# Altium PCB PCB2.PcbDoc (part 2 of 4)
Units mm, origin at the board's own origin, x right, y up, seen from the top; angles counter-clockwise.
Board outline 100 x 100 mm, 4 copper layers (TOP-SIG, GND1, GND2, BOT-SIG), stack 1.586 mm thick; 331 components, 152 nets, 869 pads, 934 vias.
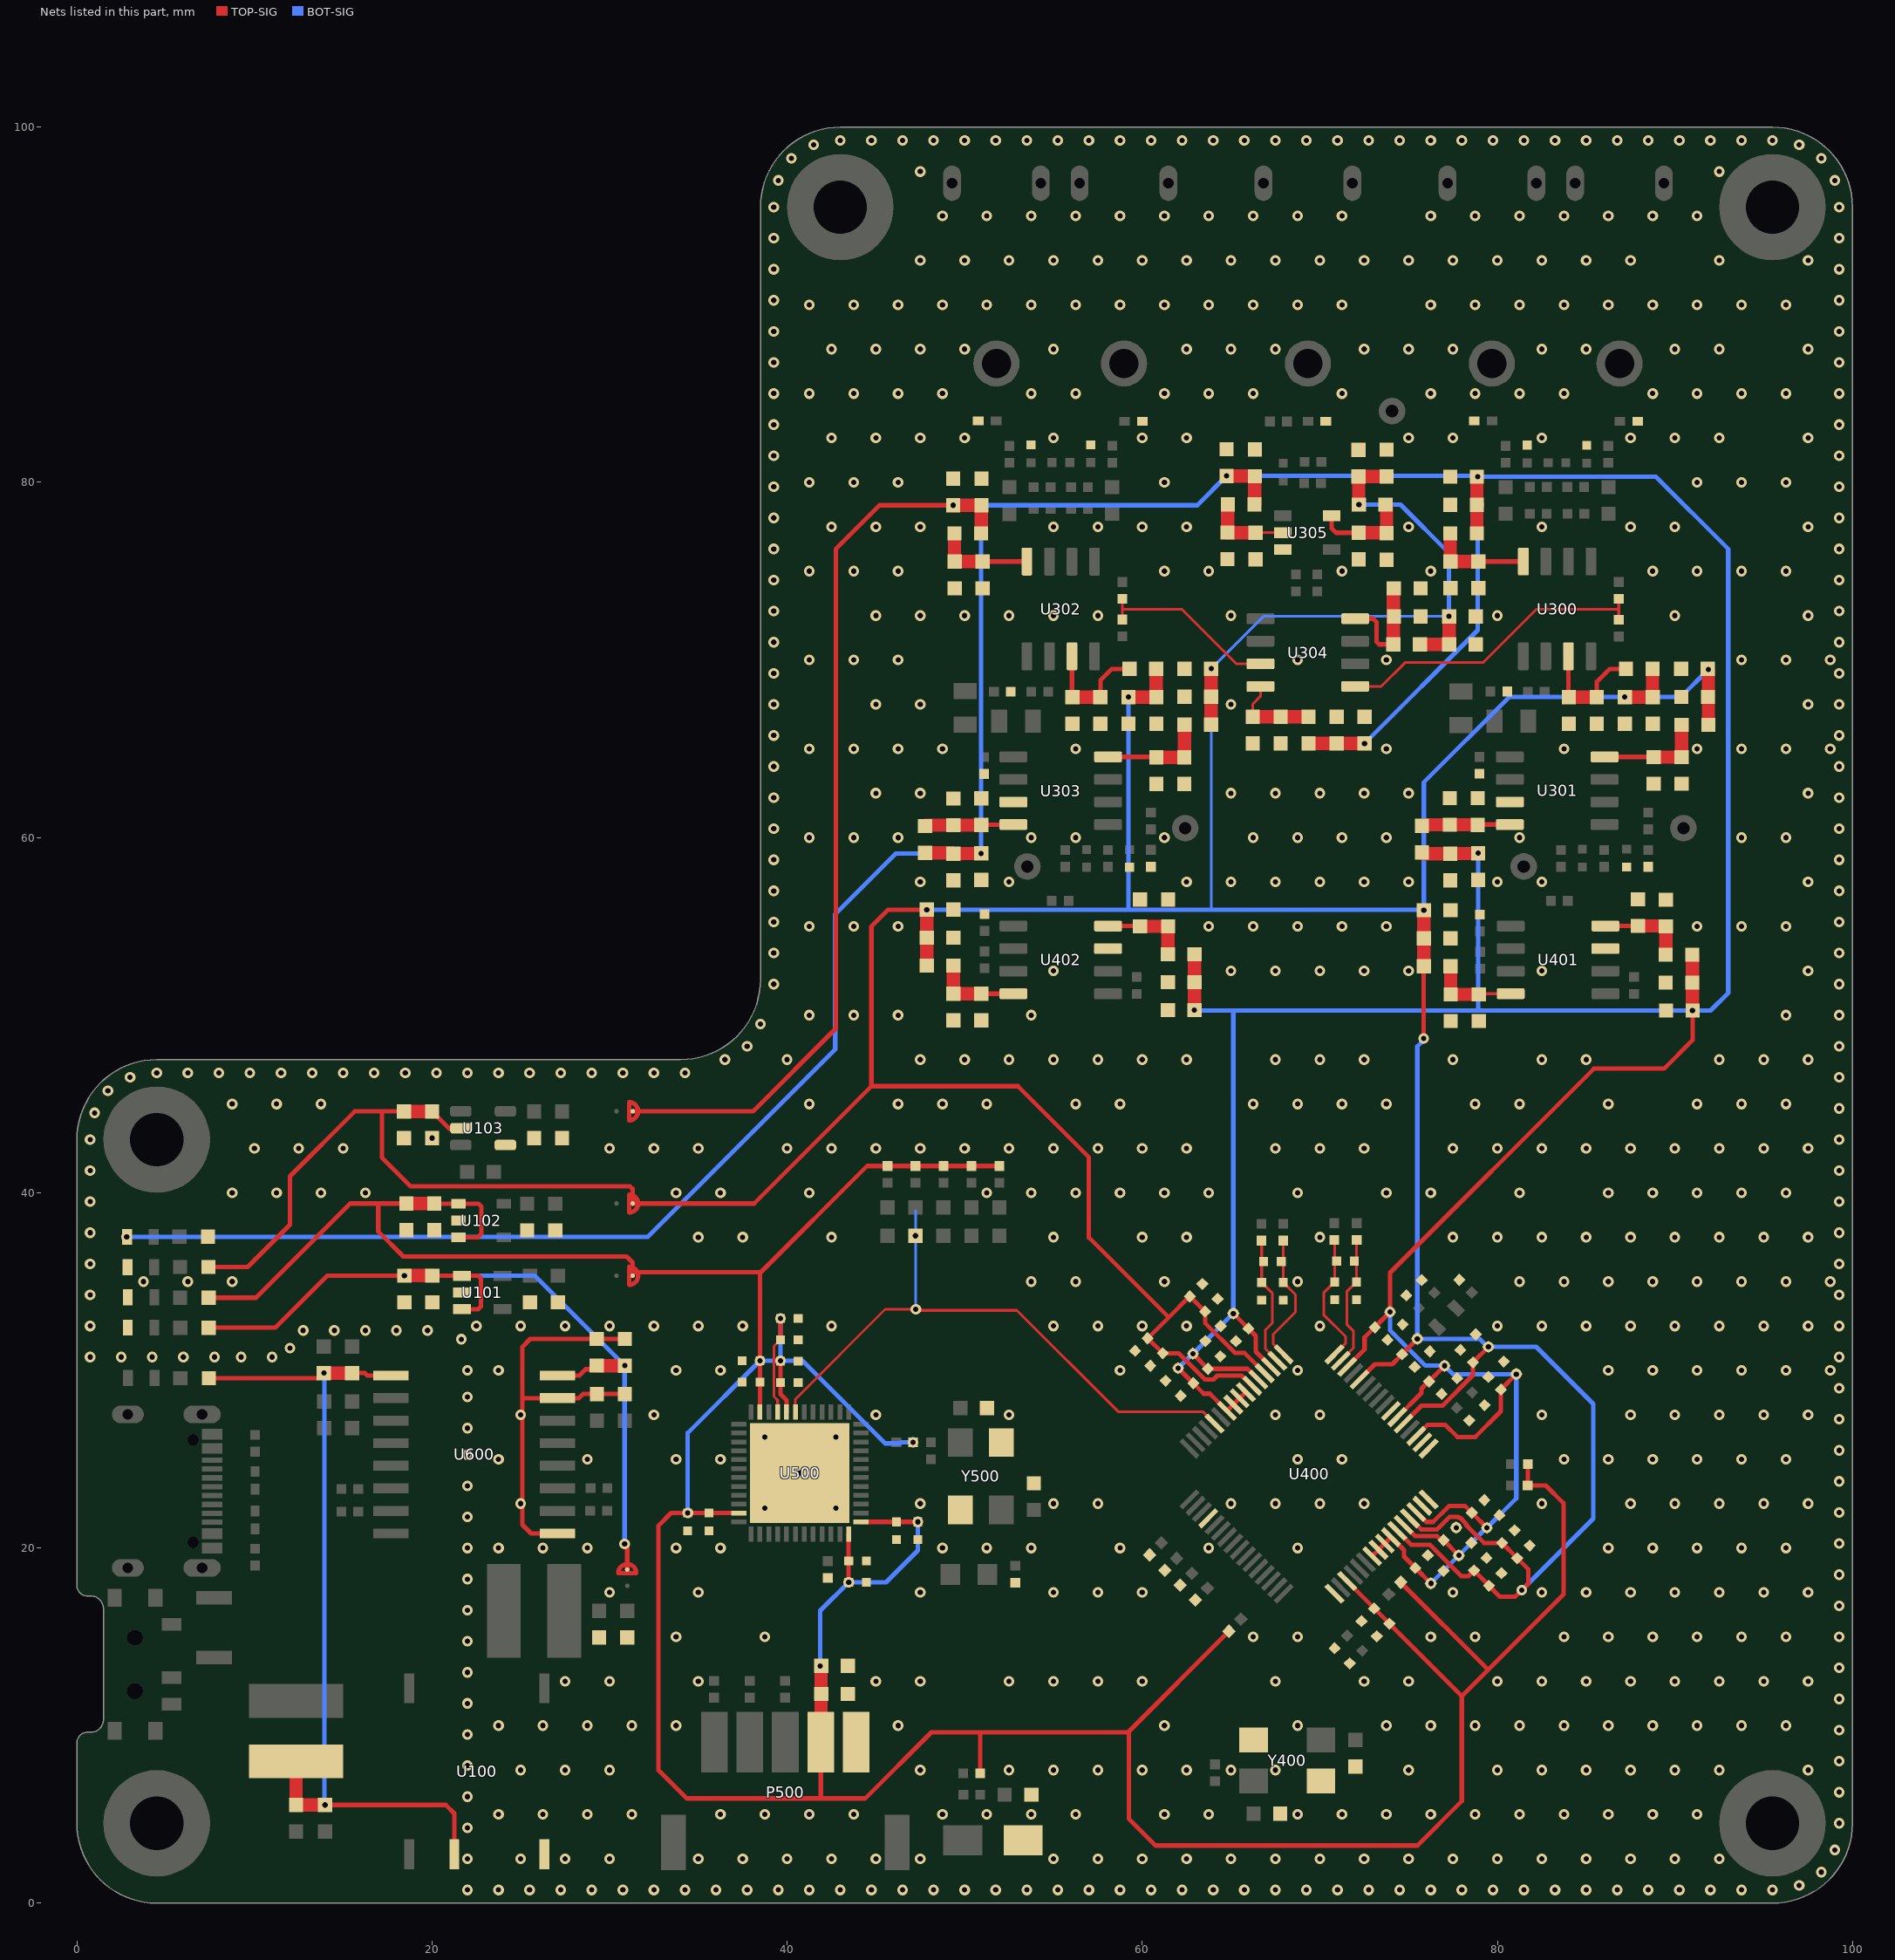
[diagram p4: the nets of this part, all layers, seen from the top]

## Part data
C100 C103 C300 C306 C309 C315: library part 0106034751035, "CAP, size 0603, 4.7 uF, 35 VDC", Capacitance="4.7 uF", Manufacture Name="Samsung Electro-Mechanics", Manufacture SN=CL10A475KL8NRNC, Operating Temperature="-55 to +125degC", Tolerance=+/-10%, Voltage Rating DC="35 VDC", ComponentLink2Description=Datasheet, ComponentLink2URL=https://www.mouser.vn/datasheet/2/585/MLCC-1837944.pdf, ComponentLink3Description=Buy, ComponentLink3URL=http://www.tme.vn/Product.aspx?id=1163#page=pro_info, Mounting Technology=SMT, Packaging="Tape and Reel", Size=0603, Supplier 1 Name=Mouser, Supplier 1 SN=187-CL10A475KL8NRNC, Supplier 1 URL=https://www.mouser.vn/ProductDetail/Samsung-Electro-Mechanics/CL10A475KL8NRNC?qs=xZ%2FP%252Ba9zWqa0jfvJtp%252BUEg%3D%3D&utm_source=mouser-refine-download&utm_medium=file&utm_campaign=CL10A475KL8NRNC&utm_content=Samsung-Electro-Mechanics, Supplier 2 Name=Digi-Key, Supplier 2 SN=1276-6794-2-ND, Supplier 2 URL=https://www.digikey.com/en/products/detail/samsung-electro-mechanics/cl10a475kl8nrnc/5961278, Supplier 3 Name=thegioiic, Supplier 3 SN=N/A, Supplier 3 URL=N/A
C101 C102 C105 C107 C109 C110 C114 C115 C319 C321 C323 C325 C327 C329 C331 C333 C335 C337 C339 C341 C343 C345 C347 C349 C351 C353 C355 C357 C359 C361 C363 C365 C449 C451 C453 C455 C461 C463 C465 C467 C502 C516 C602 C604 C605 C608: library part 0106031041050, "CAP, size 0603, 100 nF, 50 VDC", Capacitance="100 nF", Manufacture Name=TDK, Manufacture SN=CGA3E3X8R1H104K080AE, Operating Temperature="-55 to +125degC", Tolerance=+/-10%, Voltage Rating DC="50 VDC", ComponentLink2Description=Datasheet, ComponentLink2URL=https://product.tdk.com/system/files/dam/doc/product/capacitor/ceramic/mlcc/catalog/mlcc_automotive_soft_en.pdf?ref_disty=mouser, Mounting Technology=SMT, Packaging="Tape and Reel", Size=0603, Supplier 1 Name=Mouser, Supplier 1 SN=810-CGA3E3X8R1H104KA, Supplier 1 URL=https://www.mouser.com/ProductDetail/TDK/CGA3E3X8R1H104K080AE?qs=nQSIdc08i%252Bd8g3IRRgU2bw%3D%3D&utm_source=mouser-refine-download&utm_medium=file&utm_campaign=CGA3E3X8R1H104K080AE&utm_content=TDK, Supplier 2 Name=Digi-Key, Supplier 2 SN=445-173697-2-ND, Supplier 2 URL=https://www.digikey.com/en/products/detail/tdk-corporation/cga3e3x8r1h104k080ae/5809262, Supplier 3 Name=thegioiic, Supplier 3 SN=N/A, Supplier 3 URL=N/A
  C101 C102 C105: ComponentLink3Description=Buy, ComponentLink3URL=http://www.tme.vn/Product.aspx?id=739#page=pro_info
  C319 C321 C323 C325 C327 C329 C331 C333 C335 C337 C339 C341 C343 C345 C347 C349 C351 C353 C355 C357 C359 C361 C363 C365 C449 C451 C453 C455 C461 C463 C465 C467 C502 C516 C602 C604 C605 C608: Buy=https://tme.vn/Product.aspx?id=739#page=pro_info
C104 C106 C108 C111 C112 C113 C116: library part 0106032251010, "CAP, size 0603, 2.2 uF, 10 VDC", Capacitance="2.2 uF", Manufacture Name="Samsung Electro-Mechanics", Manufacture SN=CL10A225KP8NNWC, Operating Temperature="-55 to +125degC", Tolerance=+/-10%, Voltage Rating DC="10 VDC", ComponentLink2Description=Datasheet, ComponentLink2URL=https://www.mouser.vn/datasheet/2/585/Samsung_MLCC_1837944-1929650.pdf, Mounting Technology=SMT, Packaging="Tape and Reel", Size=0603, Supplier 1 Name=Mouser, Supplier 1 SN=187-CL10A225KP8NNWC, Supplier 1 URL=https://www.mouser.vn/ProductDetail/Samsung-Electro-Mechanics/CL10A225KP8NNWC?qs=f6khj2Jg0Fj5oIVDjMV6rg%3D%3D&utm_source=mouser-refine-download&utm_medium=file&utm_campaign=CL10A225KP8NNWC&utm_content=Samsung-Electro-Mechanics, Supplier 2 Name=Digi-Key, Supplier 2 SN=1276-CL10A225KP8NNWCTR-ND, Supplier 2 URL=https://www.digikey.com/en/products/detail/samsung-electro-mechanics/cl10a225kp8nnwc/16572766, Supplier 3 Name=thegioiic, Supplier 3 SN=N/A, Supplier 3 URL=N/A
C301 C305 C310 C314 C514: library part 885012205067, "WCAP-CSGP Multilayer Ceramic Chip Capacitor, General Purpose, size 0402, X7R, 10nF, 50V", Capacitance Tolerance=+/-10%, Case/Size Code=0402, Insulation Resistance=10GΩ, Manufacturer="Wurth Elektronik", Max Operating Temperature=125°C, Min Operating Temperature=-55°C, Rated Voltage (DC)=50V, Capacitance=10nF, Category="Multilayer Ceramic Chip Capacitors", Ceramic Type=X7R, ComponentLink1Description="Website Link", ComponentLink1URL=https://www.we-online.com/redexpert/article/885012205067?ad, ComponentLink2Description="Datasheet Link", ComponentLink2URL=https://www.we-online.com/redexpert/spec/885012205067?ad, Dissipation Factor=2.5%, Height=0.5mm, Length=1mm, Manufacturer Part Number=885012205067, Match Code=WCAP-CSGP, Mount="Surface Mount", Packaging="Tape and Reel", Technical Reference=X7R0402103K050DFCT10000, Width=0.5mm
  C514: Buy=https://www.digikey.com/en/products/detail/kemet/C0402C103K5RACTU/501968
C302 C304 C311 C313: library part 885012005057, "WCAP-CSGP Multilayer Ceramic Chip Capacitor, General Purpose, size 0402, NP0, 22pF, 50V", Capacitance Tolerance=+/-5%, Case/Size Code=0402, Insulation Resistance=10GΩ, Manufacturer="Wurth Elektronik", Max Operating Temperature=125°C, Min Operating Temperature=-55°C, Rated Voltage (DC)=50V, Capacitance=22pF, Category="Multilayer Ceramic Chip Capacitors", Ceramic Type=NP0, ComponentLink1Description="Website Link", ComponentLink1URL=https://www.we-online.com/redexpert/article/885012005057?ad, ComponentLink2Description="Datasheet Link", ComponentLink2URL=https://www.we-online.com/redexpert/spec/885012005057?ad, Height=0.5mm, Length=1mm, Manufacturer Part Number=885012005057, Match Code=WCAP-CSGP, Mount="Surface Mount", Packaging="Tape and Reel", Q Factor=840, Technical Reference=NP00402220J050DFCT10000, Width=0.5mm
C303 C312: library part 885012005063, "WCAP-CSGP Multilayer Ceramic Chip Capacitor, General Purpose, size 0402, NP0, 220pF, 50V", Capacitance Tolerance=+/-5%, Case/Size Code=0402, Insulation Resistance=10GΩ, Manufacturer="Wurth Elektronik", Max Operating Temperature=125°C, Min Operating Temperature=-55°C, Rated Voltage (DC)=50V, Capacitance=220pF, Category="Multilayer Ceramic Chip Capacitors", Ceramic Type=NP0, ComponentLink1Description="Website Link", ComponentLink1URL=https://www.we-online.com/redexpert/article/885012005063?ad, ComponentLink2Description="Datasheet Link", ComponentLink2URL=https://www.we-online.com/redexpert/spec/885012005063?ad, Height=0.5mm, Length=1mm, Manufacturer Part Number=885012005063, Match Code=WCAP-CSGP, Mount="Surface Mount", Packaging="Tape and Reel", Q Factor=1000, Technical Reference=NP00402221J050DFCT10000, Width=0.5mm
C307 C308 C316 C317: library part 0108051061025, "33 µF ±20% 6.3V Ceramic Capacitor X5R 0805 (2012 Metric)", Capacitance="10 uF", Manufacture Name=TDK, Manufacture SN=CGA4J1X7S1E106K125AE, Operating Temperature="-55 to +125degC", Tolerance=+/-10%, Voltage Rating DC="25 VDC", ComponentLink3Description=Buy, ComponentLink3URL=https://www.digikey.com/en/products/detail/tdk-corporation/C2012X5R0J336M125AC/2443464, Mounting Technology=SMT, Packaging="Tape and Reel", Size=0805, Supplier 1 Name=Mouser, Supplier 1 SN=810-CGA4J1X7S1E106K2, Supplier 1 URL=https://www.mouser.vn/ProductDetail/TDK/CGA4J1X7S1E106K125AE?qs=PqoDHHvF64%252BJvhmUzM2odA%3D%3D&utm_source=mouser-refine-download&utm_medium=file&utm_campaign=CGA4J1X7S1E106K125AE&utm_content=TDK, Supplier 2 Name=Digi-Key, Supplier 2 SN=445-181411-2-ND, Supplier 2 URL=https://www.digikey.com/en/products/detail/tdk-corporation/cga4j1x7s1e106k125ae/9744777, Supplier 3 Name=thegioiic, Supplier 3 SN=OEM, Supplier 3 URL=N/A
C318: library part 885012205044, "WCAP-CSGP Multilayer Ceramic Chip Capacitor, General Purpose, size 0402, X7R, 1nF, 25V", Capacitance Tolerance=+/-10%, Case/Size Code=0402, Insulation Resistance=10GΩ, Manufacturer="Wurth Elektronik", Max Operating Temperature=125°C, Min Operating Temperature=-55°C, Rated Voltage (DC)=25V, Capacitance=1nF, Category="Multilayer Ceramic Chip Capacitors", Ceramic Type=X7R, ComponentLink1Description="Website Link", ComponentLink1URL=https://www.we-online.com/redexpert/article/885012205044?ad, ComponentLink2Description="Datasheet Link", ComponentLink2URL=https://www.we-online.com/redexpert/spec/885012205044?ad, Dissipation Factor=3.5%, Height=0.5mm, Length=1mm, Manufacturer Part Number=885012205044, Match Code=WCAP-CSGP, Mount="Surface Mount", Packaging="Tape and Reel", Technical Reference=X7R0402102K025DFCT10000, Width=0.5mm
C320 C322 C324 C326 C328 C330 C332 C334 C336 C338 C340 C342 C344 C346 C348 C350 C352 C354 C356 C358 C360 C362 C364 C366 C450 C452 C454 C456 C462 C464 C466 C468: library part 0106031061010, "CAP, size 0603, 10 uF, 10 VDC", Capacitance="10 uF", Manufacture Name="Samsung Electro-Mechanics", Manufacture SN=CL10A106KP8NNWC, Operating Temperature="-55 to +125degC", Tolerance=+/-10%, Voltage Rating DC="10 VDC", Buy=https://tme.vn/Product.aspx?id=1165#page=pro_info, ComponentLink2Description=Datasheet, ComponentLink2URL=https://www.mouser.vn/datasheet/2/585/MLCC-1837944.pdf, Mounting Technology=SMT, Packaging="Tape and Reel", Size=0603, Supplier 1 Name=Mouser, Supplier 1 SN=187-CL10A106KP8NNWC, Supplier 1 URL=https://www.mouser.vn/ProductDetail/Samsung-Electro-Mechanics/CL10A106KP8NNWC?qs=xZ%2FP%252Ba9zWqZx8LSX23YqWA%3D%3D&utm_source=mouser-refine-download&utm_medium=file&utm_campaign=CL10A106KP8NNWC&utm_content=Samsung-Electro-Mechanics, Supplier 2 Name=Digi-Key, Supplier 2 SN=1276-CL10A106KP8NNWCTR-ND, Supplier 2 URL=https://www.digikey.com/en/products/detail/samsung-electro-mechanics/cl10a106kp8nnwc/16572907, Supplier 3 Name=thegioiic, Supplier 3 SN=N/A, Supplier 3 URL=https://www.thegioiic.com/tu-gom-0603-10uf-25v
C400 C402 C403 C407: library part 885012005063, "WCAP-CSGP Multilayer Ceramic Chip Capacitor, General Purpose, size 0402, NP0, 270pF, 50V", Capacitance Tolerance=+/-5%, Case/Size Code=0402, Insulation Resistance=10GΩ, Manufacturer="Wurth Elektronik", Max Operating Temperature=125°C, Min Operating Temperature=-55°C, Rated Voltage (DC)=50V, Buy=https://www.digikey.com/en/products/detail/kemet/C0402C271J5GACTU/2269192, Capacitance=220pF, Category="Multilayer Ceramic Chip Capacitors", Ceramic Type=NP0, ComponentLink1Description="Website Link", ComponentLink1URL=https://www.we-online.com/redexpert/article/885012005063?ad, ComponentLink2Description="Datasheet Link", ComponentLink2URL=https://www.we-online.com/redexpert/spec/885012005063?ad, Height=0.5mm, Length=1mm, Manufacturer Part Number=885012005063, Match Code=WCAP-CSGP, Mount="Surface Mount", Packaging="Tape and Reel", Q Factor=1000, Technical Reference=NP00402221J050DFCT10000, Width=0.5mm
C401 C404: library part 885012205060, "WCAP-CSGP Multilayer Ceramic Chip Capacitor, General Purpose, size 0402, X7R, 680pF, 50V", Capacitance Tolerance=+/-10%, Case/Size Code=0402, Insulation Resistance=10GΩ, Manufacturer="Wurth Elektronik", Max Operating Temperature=125°C, Min Operating Temperature=-55°C, Rated Voltage (DC)=50V, Buy=https://www.digikey.com/en/products/detail/murata-electronics/GRM1555C1H681JA01D/702505, Capacitance=680pF, Category="Multilayer Ceramic Chip Capacitors", Ceramic Type=X7R, ComponentLink1Description="Website Link", ComponentLink1URL=https://www.we-online.com/redexpert/article/885012205060?ad, ComponentLink2Description="Datasheet Link", ComponentLink2URL=https://www.we-online.com/redexpert/spec/885012205060?ad, Dissipation Factor=2.5%, Height=0.5mm, Length=1mm, Manufacturer Part Number=885012205060, Match Code=WCAP-CSGP, Mount="Surface Mount", Packaging="Tape and Reel", Technical Reference=X7R0402681K050DFCT10000, Width=0.5mm
C405 C408 C410 C415 C417 C419 C421 C423 C427 C431 C433 C441 C443 C447 C457 C459 C469 C471 C473 C511 C513: library part 885012105012, "1 µF ±10% 16V Ceramic Capacitor X7R 0603 (1608 Metric)", Capacitance Tolerance=+/-20%, Case/Size Code=0402, Insulation Resistance=0.05GΩ, Manufacturer="Wurth Elektronik", Max Operating Temperature=85°C, Min Operating Temperature=-55°C, Rated Voltage (DC)=10V, Buy=https://www.digikey.com/en/products/detail/kemet/C0603C105K4RACTU/2199788, Capacitance=1μF, Category="Multilayer Ceramic Chip Capacitors", Ceramic Type=X5R, ComponentLink1Description="Website Link", ComponentLink1URL=https://www.we-online.com/redexpert/article/885012105012?ad, ComponentLink2Description="Datasheet Link", ComponentLink2URL=https://www.we-online.com/redexpert/spec/885012105012?ad, Dissipation Factor=15%, Height=0.5mm, Length=1mm, Manufacturer Part Number=885012105012, Match Code=WCAP-CSGP, Mount="Surface Mount", Packaging="Tape and Reel", Technical Reference=X5R0402105M010DFCT10000, Width=0.5mm
C406 C409 C411 C412 C416 C418 C420 C422 C424 C428 C432 C434 C442 C444 C448 C458 C460 C470 C472 C474 C504 C506 C508 C510 C512: library part 885012205086, "WCAP-CSGP Multilayer Ceramic Chip Capacitor, General Purpose, size 0402, X7R, 100nF, 50V", Capacitance Tolerance=+/-10%, Case/Size Code=0402, Insulation Resistance=0.5GΩ, Manufacturer="Wurth Elektronik", Max Operating Temperature=125°C, Min Operating Temperature=-55°C, Rated Voltage (DC)=50V, Buy=tme.vn/Product.aspx?id=1812#page=pro_info, Capacitance=100nF, Category="Multilayer Ceramic Chip Capacitors", Ceramic Type=X7R, ComponentLink1Description="Website Link", ComponentLink1URL=https://www.we-online.com/redexpert/article/885012205086?ad, ComponentLink2Description="Datasheet Link", ComponentLink2URL=https://www.we-online.com/redexpert/spec/885012205086?ad, Dissipation Factor=10%, Height=0.5mm, Length=1mm, Manufacturer Part Number=885012205086, Match Code=WCAP-CSGP, Mount="Surface Mount", Packaging="Tape and Reel", Technical Reference=X7R0402104K050DFCT10000, Width=0.5mm
C413 C414 C500 C501: library part 0106032200550, "CAP, size 0603, 22 pF, 50 VDC", Manufacture Name=TDK, Manufacture SN=CGA3E2NP01H220J080AA, Operating Temperature="-55 to +125degC", Tolerance=+/-5%, Voltage Rating DC="50 VDC", Buy=https://tme.vn/Product.aspx?id=741#page=pro_info, Mounting Technology=SMT, Packaging="Tape and Reel", Size=0603, Supplier 1 Name=Mouser, Supplier 1 SN=810-CGA3E2NP01H220JA, Supplier 1 URL=https://www.mouser.com/ProductDetail/TDK/CGA3E2NP01H220J080AA?qs=xLDY6iXSiQbIDiPJq57tVA%3D%3D&utm_source=mouser-refine-download&utm_medium=file&utm_campaign=CGA3E2NP01H220J080AA&utm_content=TDK, Supplier 2 Name=Digi-Key, Supplier 2 SN=445-12401-2-ND, Supplier 2 URL=https://www.digikey.com/en/products/detail/tdk-corporation/cga3e2np01h220j080aa/3949637, Supplier 3 Name=thegioiic, Supplier 3 SN=N/A, Supplier 3 URL=N/A
C503 C505 C507 C509: library part 885012105008, "WCAP-CSGP Multilayer Ceramic Chip Capacitor, General Purpose, size 0402, X5R, 4.7μF, 6.3V", Capacitance Tolerance=+/-20%, Case/Size Code=0402, Insulation Resistance=0.01GΩ, Manufacturer="Wurth Elektronik", Max Operating Temperature=85°C, Min Operating Temperature=-55°C, Rated Voltage (DC)=6.3V, Buy=https://www.digikey.com/en/products/detail/samsung-electro-mechanics/CL05A475MP5NRNC/3887140, Capacitance=4.7μF, Category="Multilayer Ceramic Chip Capacitors", Ceramic Type=X5R, ComponentLink1Description="Website Link", ComponentLink1URL=https://www.we-online.com/redexpert/article/885012105008?ad, ComponentLink2Description="Datasheet Link", ComponentLink2URL=https://www.we-online.com/redexpert/spec/885012105008?ad, Dissipation Factor=20%, Height=0.5mm, Length=1mm, Manufacturer Part Number=885012105008, Match Code=WCAP-CSGP, Mount="Surface Mount", Packaging="Tape and Reel", Technical Reference=X5R0402475M6R3DFCT10000, Width=0.5mm
C515 C601 C603 C606 C607: library part 0106031051016, "CAP, size 0603, 1 uF, 16 VDC", Capacitance="1 uF", Manufacture Name="Samsung Electro-Mechanics", Manufacture SN=CL10B105KO8NNWC, Operating Temperature="-55 to +125degC", Tolerance=+/-10%, Voltage Rating DC="16 VDC", Buy=https://tme.vn/Product.aspx?id=728#page=pro_info, Mounting Technology=SMT, Packaging="Tape and Reel", Size=0603, Supplier 1 Name=Mouser, Supplier 1 SN=187-CL10B105KO8NNWC, Supplier 1 URL=https://www.mouser.vn/ProductDetail/Samsung-Electro-Mechanics/CL10B105KO8NNWC?qs=81r%252BiQLm7BT%252BXtc72qn1ug%3D%3D&utm_source=mouser-refine-download&utm_medium=file&utm_campaign=CL10B105KO8NNWC&utm_content=Samsung-Electro-Mechanics, Supplier 2 Name=Digi-Key, Supplier 2 SN=1276-CL10B105KO8NNWCTR-ND, Supplier 2 URL=https://www.digikey.com/en/products/detail/samsung-electro-mechanics/cl10b105ko8nnwc/16572783, Supplier 3 Name=thegioiic, Supplier 3 SN=N/A, Supplier 3 URL=https://www.thegioiic.com/tu-gom-0603-1uf-16v
D100 D403: library part 160603BlueBlur, "WL-SMCW SMT Mono-color Chip LED Blur, size 0603, Blue, 3.2V, 140deg", Color=Blue, ComponentLink1Description="Datasheet link", ComponentLink1URL=N/A, ComponentLink2Description="Supplier 1 URL", ComponentLink2URL=https://www.mouser.vn/ProductDetail/ams-OSRAM/LB-Q39E-L2OO-35-1?qs=74fRo9GAWsz%2FeNvglIOl1w%3D%3D, ComponentLink3Description="Supplier 2 URL", ComponentLink3URL=https://www.digikey.com/en/products/detail/ams-osram-usa-inc/LB-Q39E-N1OO-35-1/2176321, ComponentLink4Description="Supplier 3 URL", ComponentLink4URL=N/A, Size=0603, Supplier 1 Name=Mouser, Supplier 1 SN=720-LBQ39EL2N2351, Supplier 1 URL=https://www.mouser.vn/ProductDetail/ams-OSRAM/LB-Q39E-L2OO-35-1?qs=74fRo9GAWsz%2FeNvglIOl1w%3D%3D, Supplier 2 Name=Digi-Key, Supplier 2 SN=475-LBQ39E-N1OO-35-1TR-ND, Supplier 2 URL=https://www.digikey.com/en/products/detail/ams-osram-usa-inc/LB-Q39E-N1OO-35-1/2176321, Supplier 3 Name=ICDayRoi, Supplier 3 SN=N/A, Supplier 3 URL=N/A, Type=Blur
  D100: ComponentLink5Description=Buy, ComponentLink5URL=https://www.thegioiic.com/led-xanh-duong-0603-dan-smd-trong-suot-harvatek
D101 D401: library part 160603RedClear, "WL-SMCW SMT Mono-color Chip LED Waterclear, size 0603, Red, 2V, 140deg", Color=Red, ComponentLink1Description="Datasheet link", ComponentLink1URL=N/A, ComponentLink2Description="Supplier 1 URL", ComponentLink2URL=https://www.mouser.vn/ProductDetail/Wurth-Elektronik/150060RS75000?qs=LlUlMxKIyB3QnmZ3fw%2FVCA%3D%3D, ComponentLink3Description="Supplier 2 URL", ComponentLink3URL=https://www.digikey.com/en/products/detail/liteon/LTST-C191KRKT/386837, ComponentLink4Description="Supplier 3 URL", ComponentLink4URL=https://www.thegioiic.com/led-do-0603-dan-smd-trong-suot, Size=0603, Supplier 1 Name=Mouser, Supplier 1 SN=710-150060RS75000, Supplier 1 URL=https://www.mouser.vn/ProductDetail/Wurth-Elektronik/150060RS75000?qs=LlUlMxKIyB3QnmZ3fw%2FVCA%3D%3D, Supplier 2 Name=Digi-Key, Supplier 2 SN=160-1447-2-ND, Supplier 2 URL=https://www.digikey.com/en/products/detail/liteon/LTST-C191KRKT/386837, Supplier 3 Name=ICDayRoi, Supplier 3 SN=N/A, Supplier 3 URL=https://www.thegioiic.com/led-do-0603-dan-smd-trong-suot, Type=Clear
D102: library part 160603YellowBlur, "WL-SMCW SMT Mono-color Chip LED Blur, size 0603, Yellow, 2V, 140deg", Color=Yellow, ComponentLink1Description="Datasheet link", ComponentLink1URL=N/A, ComponentLink2Description="Supplier 1 URL", ComponentLink2URL=https://www.mouser.vn/ProductDetail/ROHM-Semiconductor/CSL1901YW1?qs=vvQtp7zwQdO0NUeC1uqWRA%3D%3D, ComponentLink3Description="Supplier 2 URL", ComponentLink3URL=https://www.digikey.com/en/products/detail/rohm-semiconductor/SML-D12Y8WT86/1641801, ComponentLink4Description="Supplier 3 URL", ComponentLink4URL=N/A, ComponentLink5Description=Buy, ComponentLink5URL=https://www.thegioiic.com/led-vang-0603-dan-smd-trong-suot, Size=0603, Supplier 1 Name=Mouser, Supplier 1 SN=755-CSL1901YW1, Supplier 1 URL=https://www.mouser.vn/ProductDetail/ROHM-Semiconductor/CSL1901YW1?qs=vvQtp7zwQdO0NUeC1uqWRA%3D%3D, Supplier 2 Name=Digi-Key, Supplier 2 SN=511-1582-2-ND, Supplier 2 URL=https://www.digikey.com/en/products/detail/rohm-semiconductor/SML-D12Y8WT86/1641801, Supplier 3 Name=ICDayRoi, Supplier 3 SN=N/A, Supplier 3 URL=N/A, Type=Blur
D103: library part 160603GreenBlur, "WL-SMCW SMT Mono-color Chip LED Blur, size 0603, Green, 3.2V, 140deg", Color=Green, ComponentLink1Description="Datasheet link", ComponentLink1URL=N/A, ComponentLink2Description="Supplier 1 URL", ComponentLink2URL=https://www.mouser.vn/ProductDetail/ROHM-Semiconductor/SMLD12EN1WT86?qs=qSfuJ%252Bfl%2Fd4fR%252B9yZydIwg%3D%3D, ComponentLink3Description="Supplier 2 URL", ComponentLink3URL=https://www.digikey.com/en/products/detail/rohm-semiconductor/SML-D12M8WT86/1641797, ComponentLink4Description="Supplier 3 URL", ComponentLink4URL=N/A, ComponentLink5Description=Buy, ComponentLink5URL=https://www.thegioiic.com/led-xanh-la-0603-dan-smd-trong-suot, Size=0603, Supplier 1 Name=Mouser, Supplier 1 SN=755-SMLD12EN1WT86, Supplier 1 URL=https://www.mouser.vn/ProductDetail/ROHM-Semiconductor/SMLD12EN1WT86?qs=qSfuJ%252Bfl%2Fd4fR%252B9yZydIwg%3D%3D, Supplier 2 Name=Digi-Key, Supplier 2 SN=511-1578-2-ND, Supplier 2 URL=https://www.digikey.com/en/products/detail/rohm-semiconductor/SML-D12M8WT86/1641797, Supplier 3 Name=ICDayRoi, Supplier 3 SN=N/A, Supplier 3 URL=N/A, Type=Blur
D104 D404: library part 160603PinkBlur, "WL-SMCW SMT Mono-color Chip LED Blur, size 0603, Pink", Color=Pink, ComponentLink1Description="Datasheet link", ComponentLink1URL=N/A, ComponentLink2Description="Supplier 1 URL", ComponentLink2URL=N/A, ComponentLink3Description="Supplier 2 URL", ComponentLink3URL=https://www.digikey.com/en/products/detail/rohm-semiconductor/SMLD12HBC7W1/3587026, ComponentLink4Description="Supplier 3 URL", ComponentLink4URL=N/A, Size=0603, Supplier 1 Name=Mouser, Supplier 1 SN=N/A, Supplier 1 URL=N/A, Supplier 2 Name=Digi-Key, Supplier 2 SN=846-1108-2-ND, Supplier 2 URL=https://www.digikey.com/en/products/detail/rohm-semiconductor/SMLD12HBC7W1/3587026, Supplier 3 Name=ICDayRoi, Supplier 3 SN=N/A, Supplier 3 URL=N/A, Type=Blur
  D104: ComponentLink5Description=Buy, ComponentLink5URL=https://www.thegioiic.com/led-hong-0603-dan-smd-trong-suot
D200 D201 D202 D203 D204 D600 D601: "8.5V (Typ) Clamp 6.3A (8/20µs) Ipp Tvs Diode Surface Mount 2-X1SON (1x.60)", Package="X1SON-2 Texas Instruments", Availability=Warning, MF="Texas Instruments", Mouser-Purchase-URL=https://snapeda.com/shop?store=Mouser&id=616615, MP=TPD1E1B04DPYR, Price=None, SnapEDA_Link=https://www.snapeda.com/parts/TPD1E1B04DPYR/Texas%20Instruments/view-part/616615/?ref=snap, Texas_Instruments-Purchase-URL=https://snapeda.com/shop?store=Texas+Instruments&id=616615
D400: library part 160603YellowClear, "WL-SMCW SMT Mono-color Chip LED Waterclear, size 0603, Yellow, 2V, 140deg", Color=Yellow, ComponentLink1Description="Datasheet link", ComponentLink1URL=N/A, ComponentLink2Description="Supplier 1 URL", ComponentLink2URL=https://www.mouser.com/ProductDetail/Wurth-Elektronik/150060YS75003?qs=Li%252BoUPsLEnvfob7qsAi9dA%3D%3D, ComponentLink3Description="Supplier 2 URL", ComponentLink3URL=https://www.digikey.com/en/products/detail/liteon/LTST-C191KSKT/386839, ComponentLink4Description="Supplier 3 URL", ComponentLink4URL=https://icdayroi.com/led-yellow-0603, Size=0603, Supplier 1 Name=Mouser, Supplier 1 SN=710-150060YS75003, Supplier 1 URL=https://www.mouser.com/ProductDetail/Wurth-Elektronik/150060YS75003?qs=Li%252BoUPsLEnvfob7qsAi9dA%3D%3D, Supplier 2 Name=Digi-Key, Supplier 2 SN=160-1448-2-ND, Supplier 2 URL=https://www.digikey.com/en/products/detail/liteon/LTST-C191KSKT/386839, Supplier 3 Name=ICDayRoi, Supplier 3 SN=N/A, Supplier 3 URL=https://icdayroi.com/led-yellow-0603, Type=Clear
D402: library part 160603GreenClear, "WL-SMCW SMT Mono-color Chip LED Waterclear, size 0603, Green, 3.2V, 140deg", Color=Green, ComponentLink1Description="Datasheet link", ComponentLink1URL=N/A, ComponentLink2Description="Supplier 1 URL", ComponentLink2URL=https://www.mouser.vn/ProductDetail/Wurth-Elektronik/150060GS75000?qs=LlUlMxKIyB0UYkq5lDO8nA%3D%3D, ComponentLink3Description="Supplier 2 URL", ComponentLink3URL=https://www.digikey.com/en/products/detail/liteon/LTST-C191KGKT/386835, ComponentLink4Description="Supplier 3 URL", ComponentLink4URL=https://www.thegioiic.com/led-xanh-la-0603-dan-smd-trong-suot, Size=0603, Supplier 1 Name=Mouser, Supplier 1 SN=710-150060GS75000, Supplier 1 URL=https://www.mouser.vn/ProductDetail/Wurth-Elektronik/150060GS75000?qs=LlUlMxKIyB0UYkq5lDO8nA%3D%3D, Supplier 2 Name=Digi-Key, Supplier 2 SN=160-1446-2-ND, Supplier 2 URL=https://www.digikey.com/en/products/detail/liteon/LTST-C191KGKT/386835, Supplier 3 Name=ICDayRoi, Supplier 3 SN=N/A, Supplier 3 URL=https://www.thegioiic.com/led-xanh-la-0603-dan-smd-trong-suot, Type=Clear
D500: library part 160805BlueClear, "WL-SMCW SMT Mono-color Chip LED Waterclear, size 0805, Blue, 3.2V, 140deg", Color=Blue, ComponentLink1Description="Datasheet link", ComponentLink1URL=N/A, ComponentLink2Description="Supplier 1 URL", ComponentLink2URL=https://www.mouser.vn/ProductDetail/Wurth-Elektronik/150080BS75000?qs=2kOmHSv6VfT2tBo3UPVqAQ%3D%3D, ComponentLink3Description="Supplier 2 URL", ComponentLink3URL=https://www.digikey.com/en/products/detail/liteon/LTST-C170TBKT/388527, ComponentLink4Description="Supplier 3 URL", ComponentLink4URL=https://www.thegioiic.com/led-xanh-duong-0805-dan-smd-trong-suot-harvatek, Size=0603, Supplier 1 Name=Mouser, Supplier 1 SN=710-150080BS75000, Supplier 1 URL=https://www.mouser.vn/ProductDetail/Wurth-Elektronik/150080BS75000?qs=2kOmHSv6VfT2tBo3UPVqAQ%3D%3D, Supplier 2 Name=Digi-Key, Supplier 2 SN=160-1579-2-ND, Supplier 2 URL=https://www.digikey.com/en/products/detail/liteon/LTST-C170TBKT/388527, Supplier 3 Name=ICDayRoi, Supplier 3 SN=N/A, Supplier 3 URL=https://www.thegioiic.com/led-xanh-duong-0805-dan-smd-trong-suot-harvatek, Type=Clear
F100: library part 061206035006, "Resettable Fuse, Size 1206, 6V, 0.35A", Hold Current=0.35A, LCSC Part #=N/A, Manufacturer=Bourns, Manufacturer Part Number=MF-NSMF035-2, Package / Case=1206, Supplier 1 Part Number=652-MF-NSMF035-2, Supplier 2 Part Number=MF-NSMF035-2TR-ND, Threshold Current=100A, Threshold Voltage=6V, Trip Current=0.75A, ComponentLink1Description=Datasheet, ComponentLink1URL=https://www.bourns.com/docs/Product-Datasheets/mfnsmf.pdf, Mount=SMD/SMT, Packaging="Tape and Reel", Supplier 1=Mouser, Supplier 1 URL=https://www.mouser.vn/ProductDetail/Bourns/MF-NSMF035-2?qs=3eVyCPG4fwnHDrvs%2FGppSw%3D%3D, Supplier 2=Digi-Key, Supplier 2 URL=https://www.mouser.vn/ProductDetail/Bourns/MF-NSMF035-2?qs=3eVyCPG4fwnHDrvs%2FGppSw%3D%3D, Supplier 3=thegioiic, Supplier 3 Part Number=MF-NSMF035-2, Supplier 3 URL=https://www.thegioiic.com/mf-nsmf035-2-cau-chi-tu-phuc-hoi-1206-6v-0-35a
FB300 FB301 FB302 FB303 FB304 FB305 FB306 FB307 FB308 FB309 FB310 FB311 FB400 FB401 FB403 FB404: library part 03060312120225, "Ferrite, 0603, 120 Ohms, 2 A", Manufacture Name="Wurth Elektronik", Manufacture SN=742792625, Maximum DC Current="2 A", Maximum DC Resistance="50 mOhms", Operating Temperature="-55 to +125degC", Test Frequency="100 MHz", Tolerance=+/-25%, Buy=https://linhkien.cxtvn.com/9545-blm18sg121tn1d-ferrite-bead-120-ohm-0603-1ln-10c.html, Impedance="120 Ohms", Mounting Technology=SMT, Packaging="Tape and Reel", Size=0603, Supplier 1 Name=Mouser, Supplier 1 SN=710-742792625, Supplier 1 URL=https://www.mouser.com/ProductDetail/Wurth-Elektronik/742792625?qs=sGAEpiMZZMt1hubY80%2Fs8OCciRuv%2FFk6PJE4za4cFPDWegNO%252Bf6fVw%3D%3D&utm_source=mouser-refine-download&utm_medium=file&utm_campaign=742792625&utm_content=Wurth-Elektronik, Supplier 2 Name=Digi-Key, Supplier 2 SN=N/A, Supplier 2 URL=N/A, Supplier 3 Name=thegioiic, Supplier 3 SN=N/A, Supplier 3 URL=N/A
J100: "USB-C (USB TYPE-C) USB 2.0 Receptacle Connector 24 (16+8 Dummy) Position Surface Mount, Right Angle; Through Hole", Package=None, Availability=Unavailable, ComponentLink1Description=Buy, ComponentLink1URL=https://www.thegioiic.com/cong-usb-cai-3-1-type-c-16-chan-thang-dan-smd, MF="{'manufacturer': u'GCT'}", MP=USB4105-GF-A, Price=None
J200 J201 J202 J203 J204: "3 PIN Socket Female Socket for PCB EEG EMG DIN42802 1.5 mm Connector", ComponentLink1Description=Buy, ComponentLink1URL=https://www.alibaba.com/product-detail/3-PIN-Socket-Female-Socket-for_62497934533.html?chatToken=TDFKeWNGRlpkWFZTWmtkNFRYRnZjVWxhVTBsU2RVcHNkRVpKVTJsMlRteERiM0ZyWlhrM2VHMXhZeTkwTVVSb2RIQnFRMGxKTmtONE9GSllWWFFyVGtka2JsY3ZLMjB6UVdnMmRsaGxWbVZpU2xFNU5HeHRNWHBhVjJNdmFXcHlSelp0VHpKc01sVnFjMGRSYUZSbkwwRm9SM0ZJYjNSd1UxVTFORmszTUhKcGRERnVaVnBHVjJsaVQwdFRTRGx6WnpCcFVURnhXbWRsZHl0UU56bE5NRkJsVjBnelNXRjZibkJGUFE9PSZ2ZXJzaW9uPTIuMC4w&encryptTargetLoginId=8pctgRBMALPo2t4oyiyajgkFqFUijPBH6wdkfYSa%2Bs4%3D
L100: library part IND_22uH_4D28, "22uH 20% 1A SMD Power Inductor 4.8x4.8x2.8 mm", ComponentLink1Description=Buy, ComponentLink1URL=http://tme.vn/Product.aspx?id=1639#page=pro_info, Supply Name=tme, Supply Part Number="22uH 20% 1A SMD Power Inductor 4.8x4.8x2.8 mm", Supply URL=http://www.tme.vn/Product.aspx?id=1639#page=pro_info
L101: library part IND_47uH_4D28, "47uH 20% 1A SMD Power Inductor 4.8x4.8x2.8 mm", Supply Part Number="22uH 20% 1A SMD Power Inductor 4.8x4.8x2.8 mm", ComponentLink1Description=Buy, ComponentLink1URL=http://www.tme.vn/Product.aspx?id=1640#page=pro_info, Supply Name=tme
P500: library part 620105131822, "WR-WTB SMT Male Horizontal Shrouded Header, pitch 2mm, 5p", Contact Resistance=20mOhm, LCSC Part #=N/A, Manufacturer="Wurth Elektronik", Operating Temperature Max="+ 85 C", Operating Temperature Min="- 25 C", Package / Case=5, Rated Current=2A, Supplier 1 Part Number=710-620105131822, Withstanding Voltage=800VAC, Working Voltage=100VAC, ComponentLink1Description=Datasheet, ComponentLink1URL=https://www.we-online.com/catalog/datasheet/620105131822.pdf, Gender=Male, Manufacturer Part Number=620105131822, Mount=SMD/SMT, Packaging="Tape and Reel", Part Number=620105131822, Pin Number=5, Pitch=2mm, Supplier 1=Mouser, Supplier 1 URL=https://www.mouser.vn/ProductDetail/Wurth-Elektronik/620105131822?qs=ZtY9WdtwX54F%2Fgkpjaf7GA%3D%3D, Supplier 2=Digi-Key, Supplier 2 Part Number=N/A, Supplier 2 URL=N/A, Supplier 3=thegioiic, Supplier 3 Part Number=N/A, Supplier 3 URL=https://www.thegioiic.com/dau-ph-2-0mm-5-chan-dan-smd-nam-ngang, Type=Horizontal
R100 R103 R104 R105 R106: "Code 102, 1/10W", ComponentLink1Description=Buy, ComponentLink1URL=https://www.thegioiic.com/dien-tro-1-kohm-0603-1
R101 R102: "RC0402FR-135K1L", ComponentLink1Description=Buy, ComponentLink1URL=https://www.digikey.com/en/products/detail/yageo/RC0402FR-135K1L/14286364
R200 R201 R202 R203 R204 R311 R324 R400 R405 R406 R411: "Code 104, 1/16W 1%", ComponentLink1Description=Buy, ComponentLink1URL=https://www.thegioiic.com/dien-tro-100-kohm-0402-1-
R300 R301 R305 R306 R313 R314 R318 R319 R328: "Code 105, 1/16W 1%", ComponentLink1Description=Buy, ComponentLink1URL=https://www.thegioiic.com/dien-tro-1-mohm-0402-1-
R302 R315: "4.22 kOhms ±1% 0.1W, 1/10W Chip Resistor 0402 (1005 Metric) Automotive AEC-Q200 Thick Film", ComponentLink1Description=Buy, ComponentLink1URL=https://www.digikey.com/en/products/detail/panasonic-electronic-components/ERJ-2RKF4221X/192338
R303 R316: "60.4 kOhms ±1% 0.063W, 1/16W Chip Resistor 0402 (1005 Metric) Moisture Resistant Thick Film", ComponentLink1Description=Buy, ComponentLink1URL=https://www.digikey.com/en/products/detail/yageo/RC0402FR-0760K4L/726643
R304 R309 R317 R322: "138 kOhms ±1% 0.1W, 1/10W Chip Resistor 0402 (1005 Metric) Automotive AEC-Q200, Moisture Resistant Thin Film", ComponentLink1Description=Buy
  R304 R317: ComponentLink1URL=https://www.digikey.com/en/products/detail/koa-speer-electronics-inc/RN73R1ETTP1383F25/10000727
  R309 R322: ComponentLink1URL=https://www.digikey.com/en/products/detail/yageo/RC0402FR-1354K9L/17024812
R307 R320: "0 Ohms Jumper Chip Resistor 0402 (1005 Metric) Moisture Resistant Thick Film", ComponentLink1Description=Buy, ComponentLink1URL=https://www.digikey.com/en/products/detail/yageo/RC0402JR-070RL/726406
R308 R310 R321 R323: "2.77 kOhms ±0.1% 0.1W, 1/10W Chip Resistor 0402 (1005 Metric) Automotive AEC-Q200, Moisture Resistant Thin Film", Buy=https://www.digikey.com/en/products/detail/koa-speer-electronics-inc/RN73R1ETTP2771B25/10003222
R312 R325 R326 R327 R329 R402 R408 R413 R414 R415 R416 R417 R418 R419 R420 R421 R500 R502: "Code 103, 1/16W 1%", ComponentLink1Description=Buy, ComponentLink1URL=https://www.thegioiic.com/dien-tro-10-kohm-0402-1-
R401 R403 R407 R409: "10 Ohms ±1% 0.063W, 1/16W Chip Resistor 0402 (1005 Metric) Moisture Resistant Thick Film", Buy=https://www.digikey.com/en/products/detail/yageo/RC0402FR-0710RL/726524
R404 R410: "Code 113, 1/16W 5%", Buy=https://www.thegioiic.com/dien-tro-11-kohm-0402-5-, ComponentLink1Description=Buy, ComponentLink1URL=https://www.thegioiic.com/dien-tro-10-kohm-0402-1-
R412: "RM06FTN49R9", Buy=http://tme.vn/Product.aspx?id=1857#page=pro_info
R422 R423 R426: "220R (Code 221), 1/16W 5% 0402", Buy=https://www.thegioiic.com/dien-tro-220-ohm-0402-5-
R424 R425 R503 R504: "Code 104, 1/16W", ComponentLink1Description=Buy, ComponentLink1URL=https://www.thegioiic.com/dien-tro-100-ohm-0402-1-
R427 R501 R505 R506 R507 R600 R601 R602 R603: "1/16W Thick Film Resistors 50V ±5% ±200ppm/℃ 24Ω 0402 Chip Resistor - Surface Mount ROHS", Buy=https://www.lcsc.com/product-detail/Chip-Resistor-Surface-Mount_FH-Guangdong-Fenghua-Advanced-Tech-RC-02W240JT_C258123.html?s_z=n_24%2520Ohm
SW100: "WS-SLSU Mini Slide Switch, Same Side Connection Side Push, SPDT, 5VDC, 300mA, 240g", LCSC Part #=N/A, Manufacturer="Wurth Elektronik", Operating Temperature Max=85°C, Operating Temperature Min=-40°C, Rated Current=300mA, Rated Voltage=5VDC, Supplier 1 Part Number=710-450404015514, Supplier 2 Part Number=732-13665-2-ND, Supplier 3 Part Number=MSK-12C02, Category="Slide Switches", Circuit=SPDT, ComponentLink1Description=Datasheet, ComponentLink1URL=https://www.we-online.com/redexpert/spec/450404015514?ad, Contact Material="Copper Alloy", Contact Plating=Silver, Height=1.1mm, Length=6.7mm, Manufacturer Part Number=450404015514, Match Code=WS-SLSU, Mount="Surface Mount", Operation Force=240g, Packaging="Tape and Reel", Supplier 1=Mouser, Supplier 1 URL=https://www.mouser.com/ProductDetail/Wurth-Elektronik/450404015514?qs=sPbYRqrBIVk21%2FxsES2IZA%3D%3D, Supplier 2=Digi-Key, Supplier 2 URL=https://www.digikey.com/en/products/detail/w%C3%BCrth-elektronik/450404015514/9950812, Supplier 3=thegioiic, Supplier 3 URL=https://www.thegioiic.com/msk-12c02-cong-tac-truot-7-chan-on-off-smd-chinh-ngang-1p2t-0-5a, Terminal Material="Copper Alloy", Terminal Plating=Silver, Width=2.7mm
SW500: library part Button_SMD_3x4mm_2P, Supply Part Number="Tụ Gốm 0603 20pF 50V", Supply Name=Thegioiic, Supply URL=https://www.thegioiic.com/tu-gom-0603-20pf-50v
TP300 TP301 TP302 TP303 TP304: "Test Point TEST-1BK", Supply Name=BanLinhKien, Supply Part Number="Test Point TEST-1BK", Supply URL=https://banlinhkien.com/test-point-test1bk-mau-den-5c-p18255999.html
U100: "Isolated Module DC DC Converter 1 Output 5V 400mA 4.5V - 5.5V Input", Mfr_Name=Murata, ComponentLink1Description=Buy, ComponentLink1URL=https://www.digikey.com/en/products/detail/murata-power-solutions-inc/NXE2S0505MC-R7/6009739, RefDes=RefDes, Type=Type
U101: "Linear Voltage Regulator IC Positive Fixed 1 Output 500mA SOT-23-5", Mfr_Name="Richtek Technology", ComponentLink1Description=Buy, ComponentLink1URL=https://www.digikey.com/en/products/detail/richtek-usa-inc/RT9013-33GB/2546347, RefDes=RefDes, Type=Type
U102: "Linear Voltage Regulator IC Positive Fixed 1 Output 200mA SOT-23-5", Mfr_Name="Texas Instruments", ComponentLink1Description=Buy, ComponentLink1URL=https://www.digikey.com/en/products/detail/texas-instruments/TPS7A0525PDBVR/9489224, RefDes=RefDes, Type=TYPE
U103: "60mA Charge Pump Voltage Inverter with Fixed 250kHz Operation", Package="SOT-23-5 Texas Instruments", Arrow_Electronics-Purchase-URL=https://snapeda.com/shop?store=Arrow+Electronics&id=1101412, Availability=Unavailable, ComponentLink1Description=Buy, ComponentLink1URL=https://www.digikey.com/en/products/detail/texas-instruments/TPS60403DBVR/1672064, DigiKey-Purchase-URL=https://snapeda.com/shop?store=DigiKey&id=1101412, MF="Texas Instruments", Mouser-Purchase-URL=https://snapeda.com/shop?store=Mouser&id=1101412, MP=TPS60403DBVR, Price=None, SnapEDA_Link=https://www.snapeda.com/parts/TPS60403DBVR/Texas%20Instruments/view-part/1101412/?ref=snap, Texas_Instruments-Purchase-URL=https://snapeda.com/shop?store=Texas+Instruments&id=1101412
U300 U302: "Precision, Low Power Instrumentation Amplifiers", ComponentLink1Description=Buy, ComponentLink1URL=https://www.digikey.com/en/products/detail/texas-instruments/INA128UA-2K5/300998, ComponentLink2Description=Datasheet, ComponentLink2URL=https://www.ti.com/lit/ds/symlink/ina129-ep.pdf?ts=1697381225295&ref_url=https%253A%252F%252Fwww.google.com%252F
U301 U303 U304 U401 U402: "0.05μV/°C max, Single-Supply CMOS Operational Amplifiers Zero-drift Series", ComponentLink1Description=Buy, ComponentLink1URL=https://www.digikey.com/en/products/detail/texas-instruments/OPA2735AIDR/1572381
U305: "Zero-Drift Amplifier 1 Circuit Rail-to-Rail SOT-23-5", Mfr_Name="Texas Instruments", ComponentLink1Description=Buy, ComponentLink1URL=https://www.digikey.com/en/products/detail/texas-instruments/OPA735AIDBVR/1572946, RefDes=RefDes, Type=Type
U400: library part AD7768-4BSTZ-RL, "24 Bit Analog to Digital Converter 4 Input 4 Sigma-Delta 64-LQFP (10x10)", Mfr_Name="Analog Devices Inc", ComponentLink1Description=Buy, ComponentLink1URL=https://www.digikey.com/en/products/detail/analog-devices-inc/AD7768-4BSTZ-RL/6056981, RefDes=RefDes, Type="Data Acquisition"
U500: "ARM® Cortex®-M4F STM32G4 Microcontroller IC 32-Bit Single-Core 170MHz 128KB (128K x 8) FLASH 48-UFQFPN (7x7)", Buy=https://www.digikey.com/en/products/detail/stmicroelectronics/STM32G431CBU6/10231569
U600: "USB Digital Isolator 5000Vrms 1 Channel 12Mbps 25kV/µs CMTI 16-SOIC (0.295\", 7.50mm Width)", Buy=https://www.lcsc.com/product-detail/Isolated-USB-ICs_Analog-Devices-ADUM4160BRWZ-RL_C57791.html
Y400 Y500: library part 830059535, "WE-XTAL Quartz Crystal, SMT, CFPX-104, 32MHz, +/-20ppm", Case/Size Code=CFPX-104, Frequency Stability=+/-30ppm, Frequency Tolerance=+/-20ppm, Load Capacitance=18pF, Manufacturer="Wurth Elektronik", Operating Temperature Max=85°C, Operating Temperature Min=-40°C, Category=Crystals, ComponentLink1Description="Website Link", ComponentLink1URL=https://www.we-online.com/redexpert/article/830059535?ad, ComponentLink2Description="Datasheet Link", ComponentLink2URL=https://www.we-online.com/redexpert/spec/830059535?ad, Frequency=32MHz, Height=1mm, Length=5mm, Manufacturer Part Number=830059535, Match Code=WE-XTAL, Mount="Surface Mount", Packaging="Tape and Reel", Width=3.2mm

## Via types
v1: diameter 0.6, hole 0.3, TOP-SIG to BOT-SIG, tented both sides, 598 vias
v2: diameter 0.6, hole 0.3, TOP-SIG to BOT-SIG, 296 vias
v3: diameter 0.6, hole 0.6, TOP-SIG to BOT-SIG, 40 vias

## Nets (pads, with @x,y where several pads share a name; then routed paths per layer and width w, separated by ;. In a path a pad name is that pad's centre, name@x,y a point inside that pad or via, vN(x,y) a via of type N, cw(c..) or ccw(c..) an arc to the next point about the centre after c; other vN are vias at no path point)
+2.5: C113.2 C114.2 C321.1 C322.2 C325.1 C326.2 C337.1 C338.2 C341.1 C342.2 C345.1 C346.2 C349.1 C350.2 C415.1 C416.2 C417.1 C418.2 C419.1 C420.2 C451.1 C452.2 C455.1 C456.2 C457.1 C458.2 C469.1 C470.2 C473.1 C474.2 D103.2 FB300.2 FB301.2 FB304.2 FB305.2 FB306.2 FB307.2 FB400.2 FB401.2 SB102.1 U103.2 U400.4 U400.6 U400.43 U400.45 U400.53 U400.60 | length 312.4
  TOP-SIG w0.25: D103.2@7.411,35.826 9.626,35.826 12,38.2 12,40.93 15.65,44.58 17.18,44.58 ; C114.2@18.43,44.58 17.18,44.58 ; C113.2@20.004,44.58 20.97,43.614 21.601,43.614 U103.2@21.625,43.639 ; v2(47.867,55.942) 45.692,55.942 44.75,55 44.75,46 ; C457.1@60.301,31.809 60.315,31.809 61.491,32.986 ; C457.1@60.311,31.809 61.152,30.967 62.048,30.967 63.532,29.484 64.014,29.484 64.236,29.706 65.603,29.706 66.174,29.136 U400.6@66.194,29.136 ; U400.4@66.902,29.843 65.751,30.994 65.219,30.994 63.54,32.673 C420.2@63.54,33.318 63.533,33.318 62.688,34.163 C419.1@62.681,34.163 62.668,34.163 61.491,32.986 ; U400.60@72.245,29.49 73.103,30.347 74.076,30.347 C416.2@74.635,30.906 74.635,30.914 75.493,31.772 v2(75.493,31.78) ; U400.43@74.366,20.964 75.141,20.19 76.195,20.19 77.969,18.415 78.364,18.415 C470.2@78.683,18.733 78.683,18.727 79.527,17.882 C469.1@79.527,17.876 80.153,17.25 81,17.25 v2(81.375,17.625) 81.75,18 81.75,18.793 C417.1@81.116,19.427 81.116,19.431 80.266,20.281 C418.2@80.266,20.286 79.248,20.286 78.494,21.04 78.494,21.044 78.233,21.305 78.233,21.375 77.911,21.697 77.841,21.697 77.787,21.751 77.311,21.751 76.61,21.05 75.715,21.05 75.094,21.671 U400.45@75.074,21.671 ; U400.53@74.72,27.015 75.721,28.016 76.913,28.016 78.626,29.729 C474.2@78.626,30.449 78.626,30.454 79.493,31.321 v2(79.493,31.326) ; v2(75.85,48.69) 75.85,52.489 75.862,52.501 FB400.2@75.863,52.756 ; 17.18,44.58 17.18,41.98 18.8,40.36 31.158,40.36 31.304,40.214 31.304,39.863 SB102.1@31.304,39.397 31.609,39.397 38.147,39.397 44.75,46 ; 44.75,46 53,46 57,42 57,37.477 61.491,32.986
  TOP-SIG w0.75: C114.2@18.43,44.58 C113.2@20.004,44.58 ; FB401.2@47.862,52.793 47.864,52.795 47.864,55.94 v2(47.867,55.942) ; v2(59.221,67.909) C345.1@60.796,67.909 60.79,67.915 60.79,69.49 FB306.2@60.784,69.496 ; FB307.2@63.88,66.359 63.882,66.36 v2(63.882,69.507) ; v2(72.201,78.748) 72.189,78.76 72.189,80.321 C325.1@72.178,80.333 72.18,80.335 73.76,80.335 C326.2@73.762,80.337 ; FB300.2@75.639,70.879 C322.2@77.281,70.879 77.28,70.88 v2(77.28,72.453) ; C451.1@75.861,54.331 v2(75.861,55.906) ; FB400.2@75.863,52.756 C451.1@75.861,54.331 ; v2(87.178,67.91) v2(87.178,67.91) 88.752,67.911 C337.1@88.753,67.912 88.747,67.917 88.747,69.491 FB304.2@88.741,69.497 ; FB305.2@91.881,66.347 v2(91.881,69.469)
  BOT-SIG w0.15: 64,55.942 63.882,56.061 v2(63.882,69.507) 66.827,72.453 v2(77.28,72.453)
  BOT-SIG w0.25: v2(47.867,55.942) 59.25,55.942 ; v2(59.221,67.909) 59.221,55.972 59.25,55.942 ; v2(72.201,78.748) 74.547,78.748 77.28,76.014 v2(77.28,72.453) ; v2(75.85,48.69) 75.85,48.595 75.493,48.238 v2(75.493,31.78) 78.992,31.78 79.445,31.326 v2(79.493,31.326) 82.184,31.326 85.4,28.11 85.4,21.65 v2(81.375,17.625) ; v2(91.881,69.469) 90.322,67.91 v2(87.178,67.91) 80.66,67.91 75.861,63.111 v2(75.861,55.906) 75.824,55.942 64,55.942 59.25,55.942
+2.5_U300: C335.1 C336.2 FB304.1 U300.7 | length 6.7
  TOP-SIG w0.25: U300.7@84.003,70.208 84.003,67.937 C335.1@84.028,67.912 ; C336.2@85.603,67.91 85.603,68.763 86.337,69.497 FB304.1@87.241,69.497
  TOP-SIG w0.75: C335.1@84.028,67.912 84.029,67.911 C336.2@85.603,67.91 C336.2@85.603,67.91
+2.5_U301: C339.1 C340.2 FB305.1 U301.8 | length 6.2
  TOP-SIG w0.25: U301.8@86.035,64.544 88.791,64.544 C339.1@88.803,64.532
  TOP-SIG w0.75: C339.1@88.803,64.532 C340.2@90.378,64.532 90.379,64.533 90.379,66.346 FB305.1@90.381,66.347
+2.5_U302: C343.1 C344.2 FB306.1 U302.7 | length 6.8
  TOP-SIG w0.25: U302.7@56.046,70.207 56.046,67.937 C343.1@56.071,67.911 ; C344.2@57.646,67.909 57.646,68.846 58.296,69.496 FB306.1@59.284,69.496
  TOP-SIG w0.75: C344.2@57.646,67.909 C344.2@57.646,67.909 C343.1@56.072,67.91 ; FB306.1@59.259,69.471 FB306.1@59.284,69.496 ; C343.1@56.071,67.911 C343.1@56.072,67.91
+2.5_U303: C347.1 C348.2 FB307.1 U303.8 | length 6.1
  TOP-SIG w0.25: U303.8@58.078,64.543 60.772,64.543 C347.1@60.796,64.52
  TOP-SIG w0.75: C347.1@60.796,64.52 60.797,64.519 C348.2@62.37,64.518 C348.2@62.37,64.518 62.375,64.523 62.375,66.354 FB307.1@62.38,66.359
+2.5_U304: C319.1 C320.2 FB300.1 U304.8 | length 6.6
  TOP-SIG w0.25: U304.8@71.993,72.324 73.004,72.324 73.19,72.137 73.19,71.025 73.336,70.879 FB300.1@74.139,70.879
  TOP-SIG w0.75: FB300.1@74.139,70.879 74.139,74 C319.1@74.173,74.034
+2.5_U305: C323.1 C324.2 FB301.1 U305.5 | length 5.6
  TOP-SIG w0.25: U305.5@70.671,78.117 70.671,77.409 70.917,77.163 C323.1@72.187,77.163
  TOP-SIG w0.75: C323.1@72.187,77.163 73.733,77.163 C324.2@73.762,77.134 73.762,78.687 FB301.1@73.701,78.748
+2.5_U401: C449.1 C450.2 FB400.1 U401.8 | length 5
  TOP-SIG w0.15: C449.1@78.951,51.171 78.988,51.209 U401.8@80.752,51.209
  TOP-SIG w0.75: FB400.1@77.363,52.756 77.369,52.75 77.369,51.175 C450.2@77.376,51.169 77.377,51.17 C449.1@78.951,51.171 C449.1@78.951,51.171
+2.5_U402: C453.1 C454.2 FB401.1 U402.8 | length 5
  TOP-SIG w0.25: C453.1@50.94,51.208 U402.8@52.744,51.208
  TOP-SIG w0.75: FB401.1@49.362,52.793 49.364,52.791 49.364,51.208 C454.2@49.366,51.206 49.367,51.207 50.939,51.207 C453.1@50.94,51.208
+3.3: C108.2 C109.2 C447.1 C448.2 C503.2 C504.2 C505.2 C506.2 C507.2 C508.2 C509.2 C510.2 C511.1 C512.2 C513.1 C514.2 C515.2 C516.1 D102.2 P500.4 R413.1 R414.1 R417.1 R420.1 R421.2 R422.2 R423.2 R424.2 R425.2 R426.2 R502.1 SB101.1 U102.1 U102.3 U400.35 U500.1 U500.20 U500.21 U500.23 U500.35 U500.48 | length 247.5
  TOP-SIG w0.15: U500.21@39.47,27.655 39.47,28.32 39.26,28.53 39.26,31.364 C514.2@39.624,31.728
  TOP-SIG w0.25: D102.2@7.421,34.09 10.09,34.09 15.394,39.394 16.978,39.394 ; C108.2@18.562,39.394 16.978,39.394 ; C109.2@20.136,39.394 20.139,39.391 U102.1@21.501,39.391 22.619,39.391 22.776,39.234 22.776,37.686 22.581,37.491 U102.3@21.501,37.491 ; SB101.1@31.304,35.327 31.304,35.519 ; v2(34.406,21.969) 33.469,21.969 32.75,21.25 32.75,7.5 34.35,5.9 41.9,5.9 ; C507.2@34.406,21.97 C508.2@35.61,21.97 U500.35@37.285,21.97 ; U500.23@38.47,27.655 C510.2@38.47,29.34 v2(38.47,30.544) 38.47,35.47 38.5,35.5 ; C511.1@39.624,30.524 C512.2@39.624,29.32 39.624,28.664 39.97,28.318 U500.20@39.97,27.655 ; C514.2@39.624,31.728 v2(39.624,32.932) ; P500.4@41.9,9.07 41.9,5.9 ; v2(43.47,18.066) C506.2@43.47,19.27 U500.48@43.47,20.785 ; R426.2@45.66,41.508 44.508,41.508 38.5,35.5 ; R502.1@50.875,7.32 50.875,9.625 ; R414.1@64.888,15.318 59.195,9.625 ; U400.35@71.538,18.136 71.538,18.127 73.918,15.747 C448.2@73.918,15.738 78,11.656 ; R413.1@74.554,18.072 79.485,13.141 ; R417.1@81.72,24.73 81.715,24.725 81.715,23.53 R421.2@81.711,23.525 82.725,23.525 83.725,22.525 83.725,17.38 79.485,13.141 ; 16.978,39.394 16.978,37.822 18.39,36.41 30.96,36.41 31.304,36.066 31.304,35.793 31.304,35.519 ; 31.304,35.519 38.481,35.519 38.5,35.5 ; 41.9,5.9 44.4,5.9 48.125,9.625 50.875,9.625 ; 50.875,9.625 59.195,9.625 ; 59.195,9.625 59.25,9.57 59.25,4.75 60.75,3.25 75.5,3.25 78,5.75 78,11.656 ; 78,11.656 79.485,13.141
  TOP-SIG w0.254: U500.1@44.155,21.47 v2(47.364,21.47) ; R426.2@45.66,41.508 R422.2@47.23,41.508 R423.2@48.81,41.508 R424.2@50.38,41.508 R425.2@51.961,41.508
  TOP-SIG w0.75: C108.2@18.562,39.394 C109.2@20.136,39.394 ; P500.4@41.9,9.07 41.91,9.08 C516.1@41.91,13.351
  BOT-SIG w0.25: v2(34.406,21.969) 34.406,26.48 v2(38.47,30.544) v2(39.624,30.544) ; v2(39.624,32.932) v2(39.624,30.544) ; v2(47.099,25.957) 46.424,25.957 46.358,25.89 45.518,25.89 40.864,30.544 v2(39.624,30.544)
  BOT-SIG w0.254: v2(41.87,13.361) 41.87,16.466 v2(43.47,18.066) 45.566,18.066 47.364,19.864 v2(47.364,21.47)
+5: C104.2 C105.2 C603.2 C604.1 D100.2 SB100.1 U101.1 U101.3 U600.16 | length 49.4
  TOP-SIG w0.25: D100.2@7.424,32.401 11.171,32.401 14.1,35.33 v2(18.45,35.33) ; C105.2@20.024,35.33 C105.2@20.024,35.33 U101.1@21.69,35.329 22.614,35.329 22.76,35.182 22.76,33.596 22.614,33.45 U101.3@21.69,33.45 ; U600.16@27.062,29.71 28.3,29.71 28.657,30.067 29.083,30.067 C603.2@29.285,30.269 ; v2(30.85,20.23) 30.85,20.135 31,19.985 SB100.1@31,18.787
  TOP-SIG w0.75: C104.2@18.464,35.344 20.01,35.344 C105.2@20.024,35.33 ; C603.2@29.285,30.267 v2(30.86,30.267)
  BOT-SIG w0.25: v2(18.45,35.33) 25.797,35.33 v2(30.86,30.267) 30.85,30.257 v2(30.85,20.23) v2@30.84,20.22
+5_USB: C100.2 C101.2 C601.2 C602.1 D101.2 L100.2 U100.3 U600.1 | length 48.7
  TOP-SIG w0.25: D101.2@7.35,29.555 13.618,29.555 v2(13.91,29.847) ; v2(13.981,5.532) C100.2@13.984,5.535 20.785,5.535 21.26,5.06 U100.3@21.26,2.756 ; C601.2@15.505,29.849 16.221,29.849 16.36,29.71 U600.1@17.689,29.71
  TOP-SIG w0.75: L100.2@12.354,7.993 12.35,7.989 C101.2@12.35,5.53 12.352,5.532 v2(13.981,5.532) ; v2(13.91,29.847) 13.911,29.848 C601.2@15.505,29.849 C601.2@15.505,29.849
  BOT-SIG w0.25: v2(13.91,29.847) 13.946,29.811 13.946,5.568 v2(13.981,5.532)
-2.5: C329.1 C330.2 C333.1 C334.2 C353.1 C354.2 C357.1 C358.2 C361.1 C362.2 C365.1 C366.2 C421.1 C422.2 C423.1 C424.2 C427.1 C428.2 C431.1 C432.2 C433.1 C434.2 C441.1 C442.2 C443.1 C444.2 C459.1 C460.2 C463.1 C464.2 C467.1 C468.2 C471.1 C472.2 FB302.2 FB303.2 FB308.2 FB309.2 FB310.2 FB311.2 FB403.2 FB404.2 R106.2 SB103.1 U400.3 U400.5 U400.7 U400.8 U400.9 U400.10 U400.39 U400.40 U400.41 U400.42 U400.44 U400.46 U400.51 U400.54 U400.62 | length 397.6
  TOP-SIG w0.25: v2(2.807,37.521) R106.2@2.832,37.521 ; SB103.1@31.304,44.59 38.09,44.59 42.75,49.25 42.75,76.25 45.209,78.709 v2(49.35,78.709) v2(49.35,78.709) ; v2(62.024,30.127) 63.461,28.69 63.809,28.69 64.777,27.722 U400.10@64.78,27.722 U400.9@65.134,28.075 U400.8@65.487,28.429 ; v2(62.854,30.939) 63.698,30.095 C428.2@63.698,30.088 65.929,30.088 66.527,29.49 U400.5@66.548,29.49 ; v2(65.13,33.205) 66.39,31.944 66.39,31.062 U400.3@67.255,30.197 ; U400.8@65.225,28.692 U400.8@65.487,28.429 ; U400.7@65.841,28.782 U400.8@65.487,28.429 ; U400.62@71.538,30.197 72.52,31.179 72.52,31.857 v2(73.956,33.294) 73.957,35.507 85.44,46.99 89.39,46.99 90.991,48.591 v2(90.991,50.271) ; U400.39@72.952,19.55 U400.40@73.306,19.903 U400.41@73.659,20.257 U400.42@74.013,20.61 74.74,19.883 74.74,19.519 C434.2@75.38,18.879 75.382,18.879 76.255,18.006 v2(76.257,18.006) ; U400.54@74.366,27.368 75.73,28.732 75.73,28.967 v2(77.026,30.264) ; U400.44@74.72,21.318 75.368,20.67 76.601,20.67 76.831,20.44 C471.1@76.976,20.44 C471.1@76.976,20.44 77.83,19.585 v2(77.83,19.583) ; U400.46@75.427,22.025 75.448,22.025 76.003,21.47 76.38,21.47 77.27,22.36 78.189,22.36 C422.2@78.56,21.988 v2(79.411,21.137) ; U400.51@75.427,26.308 75.448,26.308 76.064,26.924 77.076,26.924 77.746,26.254 78.764,26.254 80.201,27.691 C441.1@80.201,28.923 v2(81.069,29.791)